# Altium PCB stm32G431_foc.pcbdoc (part 2 of 2)
Units mil, origin at the board's own origin, x right, y up, seen from the top; angles counter-clockwise.
Board outline 3189.03 x 2357.25 mil, 2 copper layers (Top Layer, Bottom Layer); 90 components, 81 nets, 390 pads, 421 vias.
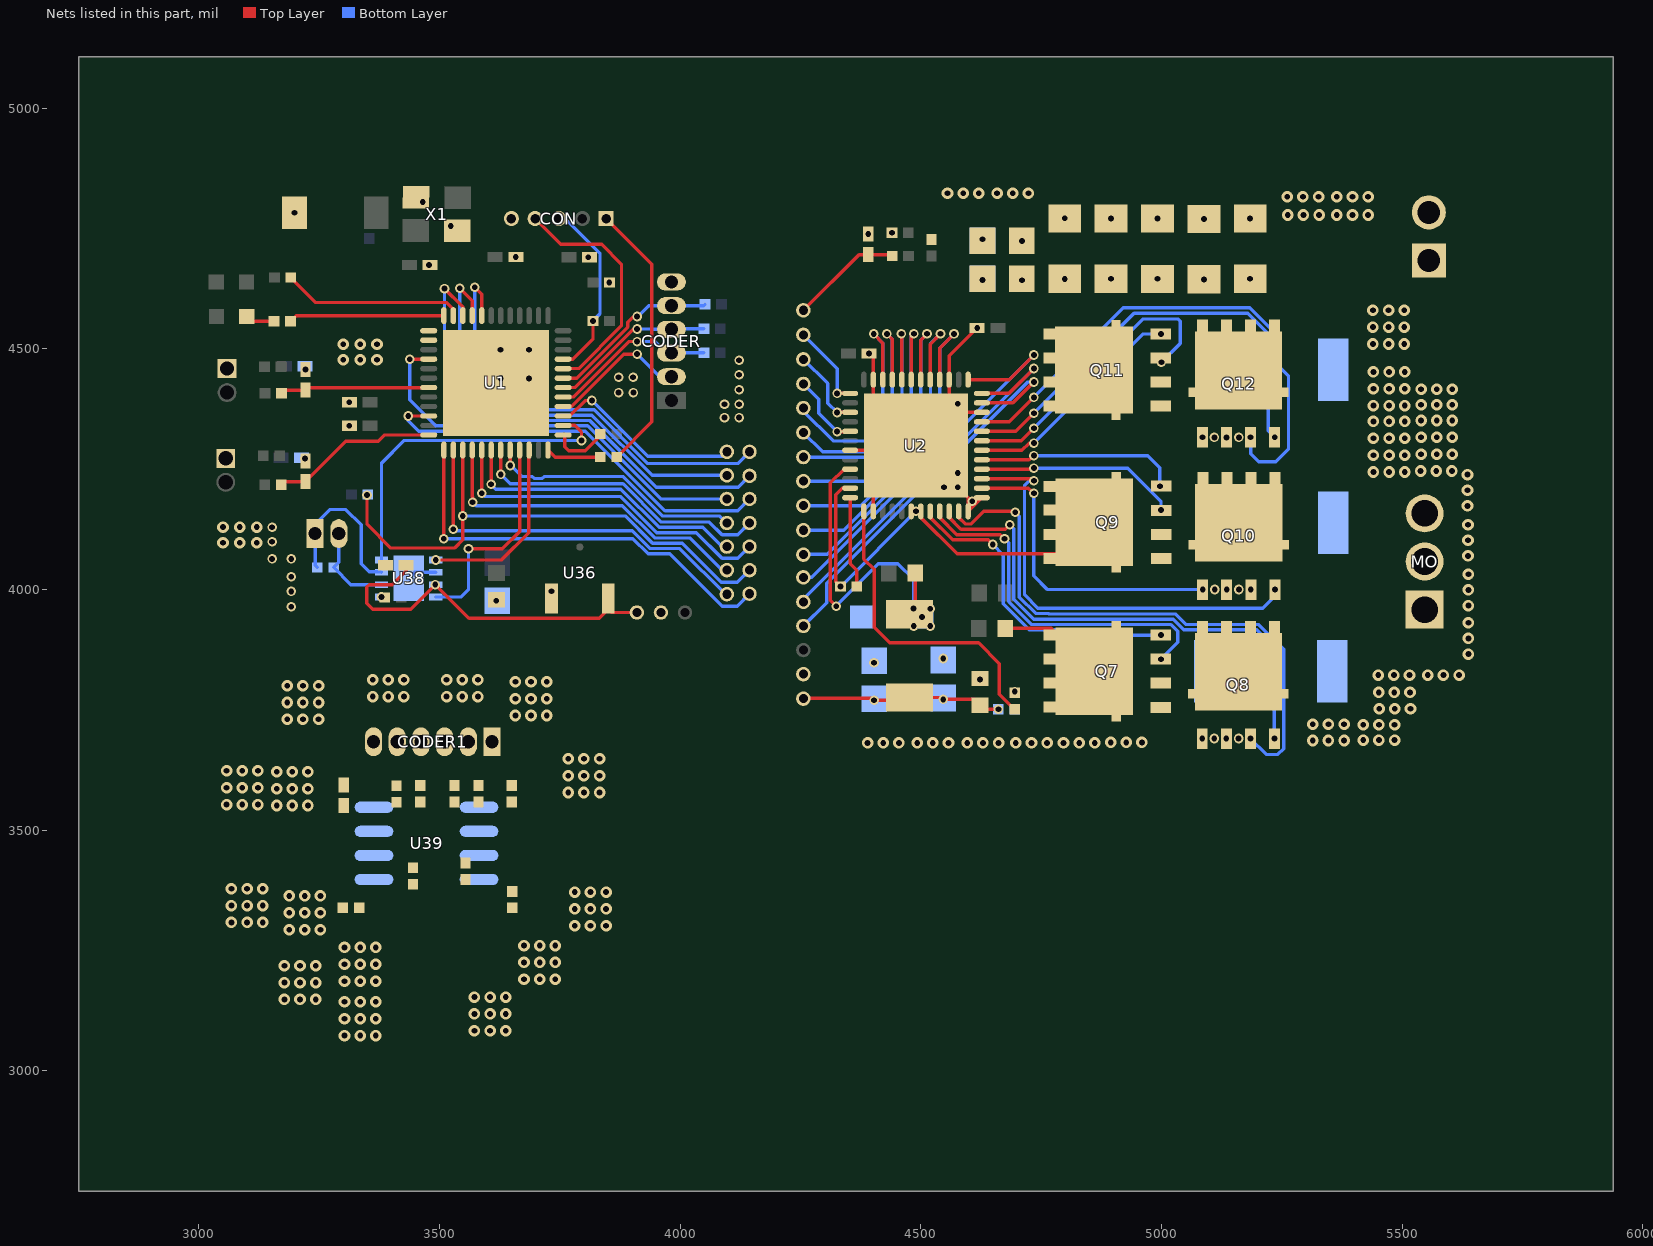
[diagram p2: the nets of this part, all layers, seen from the top]

## Via types
v1: diameter 24.02, hole 12.01, Top Layer to Bottom Layer, 261 vias
v2: diameter 20, hole 12.01, Top Layer to Bottom Layer, 160 vias

## Nets (pads, with @x,y where several pads share a name; then routed paths per layer and width w, separated by ;. In a path a pad name is that pad's centre, name@x,y a point inside that pad or via, vN(x,y) a via of type N, cw(c..) or ccw(c..) an arc to the next point about the centre after c; other vN are vias at no path point) (continued)
$1N22747: CON.1 R48.2 | length 565.1
  Top Layer w7: CON.1@3846.11,4770.82 3940.97,4675.96 3940.97,4348.14 R48.2@3868.01,4275.18
$1N22797: R42.1 U2.48 | length 190.5
  Top Layer w7: U2.48@4353.17,4190.91 4353.17,4053.98 4367.01,4040.14 R42.1@4367.01,4006.18
$1N32865: CAN.2 R43.1 U38.6 | length 189.1
  Bottom Layer w7: CAN.2@3290.58,4116.18 3290.58,4056.48 R43.1@3279.87,4045.77 3315.5,4010.14 U38.6@3379.34,4010.14
$1N35691: U1.13
$1N35795: U1.14
$1N35883: R46.1 U38.5
  other v2: 3379.34,3984.55
$1N46251: LED1.1 R49.2 | length 60.9
  Top Layer w7: LED1.1@3099.29,4567.47 3109.57,4557.18 R49.2@3155.93,4557.18
$1N47947: CAN.1 R43.2 U38.7 | length 343.5
  Bottom Layer w7: R43.2@3245.79,4045.77 3241.37,4050.19 CAN.1@3241.37,4116.18 3241.37,4135.58 3271.97,4166.18 3304.97,4166.18 3336.97,4134.18 3336.97,4053.7 3353.42,4037.25 3377.82,4037.25 U38.7@3379.34,4035.73
$1N50184: CODER1.5 R5.1
$1N50185: CODER1.4 R6.1 R8.1
$1N50186: CODER1.3 R7.1 R9.1
$1N50187: CODER1.2 R50.1 R51.1
$1N50188: R7.2 R51.2 R52.1
+5V: C48.2 C49.2 C50.2 C77.2 L2.2 pad.1@3909.97,3952.18 pad.1@4255.97,3773.18 R12.2 U36.3 U38.3 | length 1210.2
  Top Layer w7: C77.2@3430.65,4050.26 3430.65,4038.87 3401.97,4010.18 3353.97,4010.18 3349.02,4005.24 3349.02,3971.13 3360.97,3959.18 3439.97,3959.18 v2(3490.97,4010.18) 3561.08,3940.07 3831.86,3940.07 3850.61,3958.82 U36.3@3850.61,3959.55 ; U36.3@3850.61,3981.56 U36.3@3850.61,3959.55 ; pad.1@3909.97,3952.18 3857.97,3952.18 U36.3@3850.61,3959.55 ; pad.1@4255.97,3773.18 4256.59,3773.8 4398.99,3773.8 v2(4402.9,3769.9) 4470.87,3769.9 L2.2@4476.48,3775.51 4543,3775.51 v2(4546.81,3771.7) 4610.9,3771.7 C50.2@4622.97,3759.62 4631.41,3751.18 v2(4661.23,3751.18)
CAN_RX: U1.33 U38.4 | length 449.9
  Top Layer w7: v2(3559.97,4084.82) 3630.6,4084.82 3666.34,4120.55 U1.33@3666.34,4289.76
  Bottom Layer w7: U38.4@3492.14,3984.55 3545.34,3984.55 3559.97,3999.18 v2(3559.97,4084.82)
CAN_STB: U1.38 U38.8 | length 697.8
  Top Layer w7: U1.38@3756.8,4340.82 3757.16,4341.18 3780.97,4341.18 3794.83,4327.33 v2(3794.83,4309.67)
  Bottom Layer w7: U38.8@3379.34,4061.33 3379.34,4262.55 3426.46,4309.67 v2(3794.83,4309.67)
CAN_TX: U1.34 U38.1 | length 388.4
  Top Layer w7: v2(3492.14,4061.33) 3628.12,4061.33 3684.97,4118.18 3684.97,4288.69 U1.34@3686.04,4289.76
CSQ: R5.2 U39.3
DATA: R52.2 R53.1 U39.4
DBUG_RX: CON.3 R40.2 U1.45 | length 379.1
  Top Layer w7: U1.45@3756.8,4478.62 3776.98,4478.62 3818.93,4520.57 v2(3818.93,4558.18)
  Bottom Layer w7: CON.3@3747.69,4770.82 3761.22,4770.82 3833.23,4698.81 3833.23,4572.49 v2(3818.93,4558.18)
DBUG_TX: CON.4 U1.44 | length 505
  Top Layer w7: CON.4@3698.48,4770.82 3752.11,4717.18 3836.97,4717.18 3877.97,4676.18 3877.97,4547.97 3789.19,4459.18 3757.06,4459.18 U1.44@3756.8,4458.92
DRV_CAL: pad.1@4143.97,4188.18 pad.1@4255.97,4377.18 U1.22 U2.34 | length 1365.4
  Top Layer w7: v2(3434.97,4360.52) U1.22@3477.48,4360.52 ; v2(4401.97,4531.18) 4421.07,4512.08 U2.34@4421.07,4435.98
  Bottom Layer w7: v2(3434.97,4360.52) 3434.97,4350.52 3456.34,4329.15 3802.9,4329.15 3968.35,4163.7 4119.49,4163.7 pad.1@4143.97,4188.18 ; pad.1@4255.97,4377.18 4255.97,4370.63 4317.9,4308.7 4396.49,4308.7 4420.97,4333.18 4420.97,4512.18 v2(4401.97,4531.18)
DRV_CS: pad.1@4143.97,3991.18 pad.1@4255.97,4275.18 U1.25 U2.32 | length 1436.5
  Top Layer w7: v2(3508.84,4105.68) U1.25@3508.84,4289.76 ; v2(4459.65,4531.58) 4460.44,4530.79 U2.32@4460.44,4435.98
  Bottom Layer w7: v2(3508.84,4105.68) 3901.74,4105.68 3933.34,4074.09 3978.44,4074.09 4087.11,3965.42 4118.21,3965.42 pad.1@4143.97,3991.18 ; pad.1@4255.97,4275.18 4445.08,4275.18 4460.97,4291.08 4460.97,4530.26 v2(4459.65,4531.58)
DRV_EN: pad.1@4096.97,4286.18 pad.1@4255.97,4326.18 U1.39 U2.33 | length 941.8
  Top Layer w7: U1.39@3756.8,4360.52 3757.61,4359.7 3769.69,4359.7 3802.69,4392.7 v2(3816.55,4392.7) ; v2(4429.56,4531.18) 4440.76,4519.98 U2.33@4440.76,4435.98
  Bottom Layer w7: v2(3816.55,4392.7) 3817.25,4392.7 3932.89,4277.06 4087.85,4277.06 pad.1@4096.97,4286.18 ; pad.1@4255.97,4326.18 4295.96,4286.2 4414.99,4286.2 4440.97,4312.18 4440.97,4519.77 v2(4429.56,4531.18)
DRV_FAULT: pad.1@4143.97,4089.18 pad.1@4255.94,4072.38 U1.29 U2.28 | length 1436.7
  Top Layer w7: v2(3587.64,4200.14) U1.29@3587.64,4289.76 ; U2.28@4539.18,4435.98 4539.18,4501.39 v2(4568.97,4531.18)
  Bottom Layer w7: v2(3587.64,4200.14) 3594.64,4193.14 3876.6,4193.14 3951.59,4118.15 4033.38,4118.15 4086.83,4064.7 4119.49,4064.7 pad.1@4143.97,4089.18 ; pad.1@4255.94,4072.38 4256.75,4073.18 4305.39,4073.18 4538.97,4306.76 4538.97,4501.18 v2(4568.97,4531.18)
DRV_MISO: pad.1@4143.97,4040.18 pad.1@4255.97,4123.18 R15.1 U1.27 U2.29 | length 1816.4
  Top Layer w7: v2(3349.24,4196.18) 3349.24,4135.5 3398.53,4086.2 3530.99,4086.2 3548.24,4103.45 v2(3548.24,4152.84) U1.27@3548.24,4289.76 ; U2.29@4519.5,4435.98 4519.5,4510.06 v2(4540.9,4531.46)
  Bottom Layer w7: v2(3548.24,4152.84) 3885.75,4152.84 3942.46,4096.12 4004.02,4096.12 4084.96,4015.18 4118.97,4015.18 pad.1@4143.97,4040.18 ; pad.1@4255.97,4123.18 4339.81,4123.18 4519.97,4303.34 4519.97,4510.53 v2(4540.9,4531.46)
DRV_MOSI: pad.1@4096.97,4040.18 pad.1@4255.97,4174.18 U1.28 U2.30 | length 1329.5
  Top Layer w7: U1.28@3567.94,4289.76 3567.94,4192.28 3568.68,4191.54 v2(3568.68,4181.35) ; U2.30@4499.81,4435.98 4499.81,4518.13 v2(4512.92,4531.24)
  Bottom Layer w7: v2(3568.68,4181.35) 3575.68,4174.35 3879.81,4174.35 3947.02,4107.14 4020.12,4107.14 4087.07,4040.18 pad.1@4096.97,4040.18 ; pad.1@4255.97,4174.18 4375.24,4174.18 4499.97,4298.92 4499.97,4518.29 v2(4512.92,4531.24)
DRV_SCLK: pad.1@4096.97,3990.18 pad.1@4255.97,4225.18 U1.26 U2.31 | length 1378.7
  Top Layer w7: v2(3528.54,4125.17) U1.26@3528.54,4289.76 ; U2.31@4480.13,4435.98 4480.13,4525.96 v2(4485.63,4531.46)
  Bottom Layer w7: v2(3528.54,4125.17) 3531.54,4122.17 3900.84,4122.17 3937.9,4085.11 3999.46,4085.11 4094.38,3990.18 pad.1@4096.97,3990.18 ; pad.1@4255.97,4225.18 4410.66,4225.18 4479.97,4294.5 4479.97,4525.8 v2(4485.63,4531.46)
FB: R12.1 R13.2 U2.1 | length 650
  Top Layer w7: U2.1@4381.7,4162.38 4381.7,4063.32 4402.97,4042.05 4402.97,3921.18 4434.97,3889.18 4619.97,3889.18 4662.97,3846.18 4662.97,3782.05 4693.87,3751.14 R13.2@4694.97,3751.14
GHA: Q7.4 U2.8 | length 652.7
  Top Layer w7: U2.8@4519.5,4162.38 4519.5,4149.64 4566.02,4103.12 4639.77,4103.12 v2(4649.27,4093.62)
  Bottom Layer w7: v2(4649.27,4093.62) 4671.42,4071.47 4671.42,3970.42 4725.67,3916.17 4826.72,3916.17 4837.66,3905.23 v2(4999,3905.23)
GHB: Q9.4 U2.17 | length 422.6
  Top Layer w7: U2.17@4626.77,4269.65 4724.86,4269.65 4733.4,4278.2 v2(4734.97,4278.2)
  Bottom Layer w7: v2(4734.97,4278.2) 4971.96,4278.2 4996.7,4253.45 v2(4996.7,4214.6)
GHC: Q11.4 U2.18 | length 472.3
  Top Layer w7: U2.18@4626.77,4289.34 4626.93,4289.18 4710.07,4289.18 4725.07,4304.18 v2(4734.97,4304.18)
  Bottom Layer w7: v2(4734.97,4304.18) 4961.78,4530.99 v2(4998.87,4530.99)
GLA: Q8.4 U2.10 | length 1083.5
  Top Layer w7: U2.10@4558.87,4162.38 4558.87,4149.64 4583.36,4125.15 4675.48,4125.15 v2(4684.99,4134.66)
  Bottom Layer w7: v2(4684.99,4134.66) 4693.46,4126.19 4693.46,3979.54 4734.8,3938.2 5024.53,3938.2 5046.55,3916.18 5197.97,3916.18 5234.77,3879.38 v2(5234.77,3690.27)
GLB: Q10.4 U2.15 | length 917.1
  Top Layer w7: U2.15@4626.77,4230.28 4730.87,4230.28 v2(4734.97,4226.18)
  Bottom Layer w7: v2(4734.97,4226.18) 4725.07,4226.18 4715.49,4216.6 4715.49,3988.67 4742.97,3961.18 5210.97,3961.18 5235.68,3985.89 v2(5235.68,3999.92)
GLC: Q12.4 U2.20 | length 935.2
  Top Layer w7: U2.20@4626.77,4328.71 4697.5,4328.71 v2(4734.97,4366.18)
  Bottom Layer w7: v2(4734.97,4366.18) 4942.97,4574.18 5178.97,4574.18 5221.97,4531.18 5221.97,4329.46 v2(5235.28,4316.15)
GND: C1.1 C2.1 C44.1 C47.1 C48.1 C49.1 C50.1 C52.1 C53.1 C57.1 C59.2 C60.1 C61.1 C62.1 C63.1 C64.1 C65.1 C66.1 C67.1 C68.1 C69.1 C70.1 C71.1 C72.1 C73.1 C77.1 C78.1 CODER1.1 CODER.6 CON.5 D1.2 pad.1@3959.97,3952.18 pad.1@4255.97,3824.18 R11.2 R13.1 R18.2 R19.2 R20.2 R34.1 RST.1 TMP1.1 TMP2.1 U1.49 U2.2 U2.12 U2.13 U2.22 U2.27 U2.35 U2.43 U2.49 U36.1 U38.2 U38.9 U39.7 VIN.2 X1.2 X1.4 | length 1069.2
  Top Layer w7: U2.43@4353.17,4289.34 4480.13,4289.34 4401.39,4210.6 U2.2@4401.39,4162.38 ; v2(4392.43,4490.18) 4401.39,4481.22 U2.35@4401.39,4435.98 4401.39,4387.76 U2.49@4489.97,4299.18 v2(4576.59,4212.57) 4598.24,4190.91 U2.12@4598.24,4162.38 U2.13@4626.77,4190.91 ; v2(4617.05,4543.64) 4558.87,4485.46 U2.27@4558.87,4435.98 4558.87,4368.08 U2.22@4626.77,4368.08
  Bottom Layer w7: U38.9@3435.74,4022.94 3448.53,4035.73 U38.2@3492.14,4035.73
  other v1: 3302.47,3073.18 3334.97,3073.18 3367.47,3073.18 3572.47,3083.18 3604.97,3083.18 3637.47,3083.18 3302.47,3108.18 3334.97,3108.18 3367.47,3108.18 3572.47,3118.18 3604.97,3118.18 3637.47,3118.18 3302.47,3143.18 3334.97,3143.18 3367.47,3143.18 3177.47,3148.18 3209.97,3148.18 3242.47,3148.18 3572.47,3153.18 3604.97,3153.18 3637.47,3153.18 3177.47,3183.18 3209.97,3183.18 3242.47,3183.18 3302.47,3186.18 3334.97,3186.18 3367.47,3186.18 3675.47,3190.18 3707.97,3190.18 3740.47,3190.18 3177.47,3218.18 3209.97,3218.18 3242.47,3218.18 3302.47,3221.18 3334.97,3221.18 3367.47,3221.18 3675.47,3225.18 3707.97,3225.18 3740.47,3225.18 3302.47,3256.18 3334.97,3256.18 3367.47,3256.18 3675.47,3260.18 3707.97,3260.18 3740.47,3260.18 3187.47,3293.18 3219.97,3293.18 3252.47,3293.18 3780.97,3301.18 3813.47,3301.18 3845.97,3301.18 3067.47,3308.18 3099.97,3308.18 3132.47,3308.18 3187.47,3328.18 3219.97,3328.18 3252.47,3328.18 3780.97,3336.18 3813.47,3336.18 3845.97,3336.18 3067.47,3343.18 3099.97,3343.18 3132.47,3343.18 3187.47,3363.18 3219.97,3363.18 3252.47,3363.18 3780.97,3371.18 3813.47,3371.18 3845.97,3371.18 3067.47,3378.18 3099.97,3378.18 3132.47,3378.18 3161.47,3551.18 3193.97,3551.18 3226.47,3551.18 3057.47,3553.18 3089.97,3553.18 3122.47,3553.18 3767.47,3578.18 3799.97,3578.18 3832.47,3578.18 3161.47,3586.18 3193.97,3586.18 3226.47,3586.18 3057.47,3588.18 3089.97,3588.18 3122.47,3588.18 3767.47,3613.18 3799.97,3613.18 3832.47,3613.18 3161.47,3621.18 3193.97,3621.18 3226.47,3621.18 3057.47,3623.18 3089.97,3623.18 3122.47,3623.18 3767.47,3648.18 3799.97,3648.18 3832.47,3648.18 4389.47,3681.18 4421.97,3681.18 4454.47,3681.18 4492.47,3681.18 4524.97,3681.18 4557.47,3681.18 4596.47,3681.18 4628.97,3681.18 4661.47,3681.18 4697.47,3681.18 4729.97,3681.18 4762.47,3681.18 4796.47,3681.18 4828.97,3681.18 4861.47,3681.18 4894.47,3682.18 4926.97,3682.18 4959.47,3682.18 5314.47,3686.18 5346.97,3686.18 5379.47,3686.18 5419.47,3687.18 5451.97,3687.18 5484.47,3687.18 5419.47,3719.18 5451.97,3719.18 5484.47,3719.18 5314.47,3720.18 5346.97,3720.18 5379.47,3720.18 3183.47,3730.18 3215.97,3730.18 3248.47,3730.18 3657.47,3738.18 3689.97,3738.18 3722.47,3738.18 5452.47,3752.18 5484.97,3752.18 5517.47,3752.18 3183.47,3765.18 3215.97,3765.18 3248.47,3765.18 3657.47,3773.18 3689.97,3773.18 3722.47,3773.18 3361.01,3777.46 3393.51,3777.46 3426.01,3777.46 3514.64,3777.46 3547.14,3777.46 3579.64,3777.46 5451.47,3786.18 5483.97,3786.18 5516.47,3786.18 3183.47,3800.18 3215.97,3800.18 3248.47,3800.18 3657.47,3808.18 3689.97,3808.18 3722.47,3808.18 3361.01,3812.46 3393.51,3812.46 3426.01,3812.46 3514.64,3812.46 3547.14,3812.46 3579.64,3812.46 5450.47,3822.18 5482.97,3822.18 5515.47,3822.18 5553.47,3822.18 5585.97,3822.18 5618.47,3822.18 5637.91,3865.84 5637.91,3898.34 5637.91,3930.84 5637.97,3966.68 5637.97,3999.18 5637.97,4031.68 5636.97,4069.68 3049.97,4097.18 3084.97,4097.18 3119.97,4097.18 5636.97,4102.18 3049.97,4129.68 3084.97,4129.68 3119.97,4129.68 5636.97,4134.68 5635.97,4173.68 5635.97,4206.18 5635.97,4238.68 5440.47,4244.18 5472.97,4244.18 5505.47,4244.18 5538.47,4246.18 5570.97,4246.18 5603.47,4246.18 5440.47,4279.18 5472.97,4279.18 5505.47,4279.18 5539.47,4281.18 5571.97,4281.18 5604.47,4281.18 5440.47,4314.18 5472.97,4314.18 5505.47,4314.18 5539.47,4316.18 5571.97,4316.18 5604.47,4316.18 5440.47,4349.18 5472.97,4349.18 5505.47,4349.18 5539.47,4351.18 5571.97,4351.18 5604.47,4351.18 5440.47,4382.18 5472.97,4382.18 5505.47,4382.18 5539.47,4384.02 5571.97,4384.02 5604.47,4384.02 5539.47,4416.18 5571.97,4416.18 5604.47,4416.18 5440.47,4417.18 5472.97,4417.18 5505.47,4417.18 5440.47,4452.18 5472.97,4452.18 5505.47,4452.18 3299.97,4477.18 3334.97,4477.18 3369.97,4477.18 3299.97,4509.68 3334.97,4509.68 3369.97,4509.68 5439.47,4510.18 5471.97,4510.18 5504.47,4510.18 5439.47,4545.18 5471.97,4545.18 5504.47,4545.18 5439.47,4580.18 5471.97,4580.18 5504.47,4580.18 5262.47,4778.18 5294.97,4778.18 5327.47,4778.18 5364.47,4778.18 5396.97,4778.18 5429.47,4778.18 5261.47,4816.18 5293.97,4816.18 5326.47,4816.18 5364.47,4816.18 5396.97,4816.18 5429.47,4816.18 4555.47,4823.18 4587.97,4823.18 4620.47,4823.18 4658.47,4823.18 4690.97,4823.18 4723.47,4823.18
  other v2: 4694.97,3787.83 4622.97,3812.78 4402.71,3847.75 4546.81,3856.54 3191.99,3964.28 3617.97,3976.81 3191.99,3996.1 3732.5,3996.56 3191.99,4026.34 3151.97,4063.64 3191.99,4063.64 3151.97,4099.22 3151.97,4129.18 4606.97,4183.18 4548.28,4212.57 4576.59,4242.2 3220.15,4272.1 3312.51,4340.18 4091.97,4357.18 4122.41,4357.18 4091.96,4385.13 4122.41,4385.13 4576.59,4385.8 3312.51,4389.18 3871.97,4409.18 3902.75,4409.18 4122.41,4414.89 3626.98,4438.28 3686,4438.28 3871.97,4441.18 3902.07,4441.18 4122.41,4446.03 3221.51,4457.07 4122.41,4476.48 3626.88,4498.18 3685.97,4498.18 3852.72,4638.18 3477.87,4674.18 3808.87,4690.18 3658.43,4691.18 4710.1,4724.42 4628.1,4727.73 4390.97,4738.64 4440.03,4741.12 3523.05,4755.46 5088.26,4770.11 4799.26,4771.4 4895.26,4770.94 4991.75,4770.94 5184.26,4771.11 3198.44,4782.81 3464.97,4805.18
IFA: R9.2 U39.5
IFB: R50.2 U39.8
IFC: R8.2 U39.1
INHA: pad.1@4096.97,4089.18 pad.1@4255.97,4529.18 U1.30 U2.37 | length 792.6
  Top Layer w7: v2(3607.12,4218.62) 3607.12,4289.55 U1.30@3607.34,4289.76 ; v2(4325.97,4407.45) U2.37@4353.17,4407.45
  Bottom Layer w7: v2(3607.12,4218.62) 3617.08,4208.67 3876.65,4208.67 3956.15,4129.17 4047.09,4129.17 4087.07,4089.18 pad.1@4096.97,4089.18 ; pad.1@4255.97,4529.18 4325.97,4459.18 v2(4325.97,4407.45)
INHB: pad.1@4143.97,4138.18 pad.1@4255.97,4478.18 U1.31 U2.39 | length 797.3
  Top Layer w7: v2(3626.94,4239.11) U1.31@3626.94,4289.76 ; v2(4325.97,4367.88) 4326.18,4368.08 U2.39@4353.17,4368.08
  Bottom Layer w7: v2(3626.94,4239.11) 3646.36,4219.68 3881.21,4219.68 3960.71,4140.18 4060.35,4140.18 4086.83,4113.7 4119.49,4113.7 pad.1@4143.97,4138.18 ; pad.1@4255.97,4478.18 4255.97,4478.64 4306.49,4428.12 4306.49,4387.36 v2(4325.97,4367.88)
INHC: pad.1@4096.97,4138.18 pad.1@4255.97,4427.18 U1.32 U2.41 | length 690.6
  Top Layer w7: U1.32@3646.64,4289.76 3646.85,4289.54 v2(3646.85,4257.59) ; v2(4325.97,4328.18) 4352.64,4328.18 U2.41@4353.17,4328.71
  Bottom Layer w7: v2(3646.85,4257.59) 3648.85,4257.59 3671.74,4234.7 3692.9,4234.7 3696.9,4230.7 3713.04,4230.7 3717.04,4234.7 3881.78,4234.7 3963.79,4152.68 4082.47,4152.68 pad.1@4096.97,4138.18 ; pad.1@4255.97,4427.18 4287.97,4395.18 4287.97,4366.18 v2(4325.97,4328.18)
LED_1: R31.1 U1.11 | length 378.3
  Top Layer w7: R31.1@3191.01,4648.18 3242.92,4596.28 3515.05,4596.28 3528.54,4582.79 U1.11@3528.54,4569.08
LED_2: R49.1 U1.12 | length 323.8
  Top Layer w7: R49.1@3190.01,4557.18 3201.9,4569.08 U1.12@3508.84,4569.08
SCK: R6.2 U39.2
SHA: MO.1 Q7.1 Q7.2 Q7.3 Q8.5 Q8.6 Q8.7 Q8.8 Q8.9 U2.9 | length 749.6
  Top Layer w7: U2.9@4539.18,4162.38 4539.18,4149.65 4574.69,4114.14 4665.5,4114.14 v2(4673.97,4105.67)
  Bottom Layer w7: v2(4673.97,4105.67) 4682.44,4097.2 4682.44,3974.98 4730.24,3927.18 5019.97,3927.18 5033.97,3913.18 5033.97,3890.18 v2(4998.97,3855.18)
SHB: MO.2 Q9.1 Q9.2 Q9.3 Q10.5 Q10.6 Q10.7 Q10.8 Q10.9 U2.16 | length 419.7
  Top Layer w7: U2.16@4626.77,4249.97 4732.73,4249.97 v2(4734.97,4252.22)
  Bottom Layer w7: v2(4734.97,4252.22) 4929.94,4252.22 4998.97,4183.18 v2(4998.97,4165.18)
SHC: MO.3 Q11.1 Q11.2 Q11.3 Q12.5 Q12.6 Q12.7 Q12.8 Q12.9 U2.19 | length 620.2
  Top Layer w7: U2.19@4626.77,4309.02 4708.81,4309.02 v2(4734.97,4335.18)
  Bottom Layer w7: v2(4734.97,4335.18) 4961.97,4562.18 5033.97,4562.18 5038.92,4557.24 5038.92,4511.18 v2(4999.95,4472.21)
SOA: pad.1@4143.97,4236.18 pad.1@4255.97,4025.18 U1.10 U2.25 | length 1856.4
  Top Layer w7: v2(3510.24,4625.18) 3548.24,4587.18 U1.10@3548.24,4569.08 ; U2.25@4598.24,4435.98 4683.77,4435.98 v2(4734.97,4487.18)
  Bottom Layer w7: v2(3510.24,4625.18) 3510.24,4382.92 3541.97,4351.18 3812.03,4351.18 3950.51,4212.7 4120.49,4212.7 pad.1@4143.97,4236.18 ; pad.1@4255.97,4025.18 4272.97,4025.18 v2(4734.97,4487.18)
SOB: pad.1@4096.97,4237.18 pad.1@4255.97,3974.18 U1.9 U2.24 | length 1733.5
  Top Layer w7: v2(3541.97,4626.18) 3567.94,4600.22 U1.9@3567.94,4569.08 ; U2.24@4626.77,4407.45 4683.24,4407.45 v2(4734.97,4459.18)
  Bottom Layer w7: v2(3541.97,4626.18) 3541.97,4393.18 3572.96,4362.2 3816.59,4362.2 3941.61,4237.18 pad.1@4096.97,4237.18 ; pad.1@4255.97,3974.18 4255.97,3980.18 v2(4734.97,4459.18)
SOC: pad.1@4143.97,4286.18 pad.1@4255.97,3924.18 U1.8 U2.23 | length 1775.8
  Top Layer w7: v2(3572.97,4628.18) 3587.64,4613.52 U1.8@3587.64,4569.08 ; U2.23@4626.77,4387.76 4691.54,4387.76 v2(4734.96,4431.18)
  Bottom Layer w7: v2(3572.97,4628.18) 3572.97,4391.18 3590.94,4373.22 3821.15,4373.22 3932.67,4261.7 4119.49,4261.7 pad.1@4143.97,4286.18 ; pad.1@4255.97,3924.18 4304.63,3972.84 4304.63,4013.26 4722.55,4431.18 v2(4734.96,4431.18)
SPA: Q8.1 Q8.2 Q8.3 R18.1 U2.11 | length 1216.3
  Top Layer w7: U2.11@4578.55,4162.38 4578.55,4149.65 4592.03,4136.17 4604.45,4136.17 4630.67,4162.38 4694.05,4162.38 v2(4696,4160.44)
  Bottom Layer w7: v2(4696,4160.44) 4704.47,4151.97 4704.47,3984.11 4738.41,3950.17 4764.49,3950.17 4765.44,3949.22 5029.1,3949.22 5051.11,3927.2 5202.53,3927.2 5254.26,3875.48 5254.26,3669.47 5241.97,3657.18 5217.86,3657.18 v2(5184.77,3690.27)
  other v2: 5084.77,3690.27 5109.71,3690.27 5134.77,3690.27 5160.34,3690.27
SPB: Q10.1 Q10.2 Q10.3 R19.1 U2.14 | length 647.1
  Top Layer w7: U2.14@4626.77,4210.6 4723,4210.6 4726.9,4206.7 4728.47,4206.7 v2(4734.97,4200.2)
  Bottom Layer w7: v2(4734.97,4200.2) 4734.97,4028.18 4763.24,3999.92 v2(5085.88,3999.92)
  other v2: 5110.6,3999.92 5135.68,3999.92 5160.94,3999.92 5185.68,3999.92
SPC: Q12.1 Q12.2 Q12.3 R20.1 U2.21 | length 1112.8
  Top Layer w7: U2.21@4626.77,4348.39 4684.18,4348.39 v2(4734.97,4399.18)
  Bottom Layer w7: v2(4734.97,4399.18) 4920.97,4585.18 5183.53,4585.2 5232.99,4535.75 5232.99,4475.17 5263.97,4444.18 5263.97,4291.18 5237.97,4265.18 5201.97,4265.18 5185.28,4281.87 v2(5185.28,4316.15)
  other v2: 5085.28,4316.15 5110.01,4316.04 5135.28,4316.04 5160.94,4316.04
SPI1_CS: CODER.2 U1.40 | length 289.6
  Top Layer w7: U1.40@3756.8,4380.22 3773.58,4380.22 3882.58,4489.22 v2(3910.47,4489.22)
  Bottom Layer w7: v2(3910.47,4489.22) 3957.52,4442.17 CODER.2@3981.78,4442.17
SPI1_MISO_A: CODER.4 R24.2 U1.42 | length 343.6
  Top Layer w7: U1.42@3756.8,4419.62 3780.78,4419.62 3902.35,4541.18 v2(3910.47,4541.18)
  Bottom Layer w7: v2(3910.47,4541.18) 3939.84,4541.18 3940.42,4540.6 CODER.4@3981.78,4540.59 3982.99,4541.81 R24.2@4049.27,4541.81
SPI1_MOSI_B: CODER.5 R25.2 U1.43 | length 364.3
  Top Layer w7: U1.43@3756.8,4439.22 3784.8,4439.22 3890.99,4545.4 3890.99,4555.3 3902.85,4567.17 v2(3910.47,4567.17)
  Bottom Layer w7: v2(3910.47,4567.17) 3911.96,4567.17 3934.59,4589.81 CODER.5@3981.78,4589.81 4048.66,4589.81 R25.2@4051.65,4592.79
SPI1_SCLK_Z: CODER.3 R23.2 U1.41 | length 350.3
  Top Layer w7: U1.41@3756.8,4399.92 3777.71,4399.92 3892.99,4515.2 v2(3910.47,4515.2)
  Bottom Layer w7: v2(3910.47,4515.2) 3948.07,4515.2 3971.88,4491.39 CODER.3@3981.78,4491.38 3982.2,4491.81 R23.2@4049.27,4491.81
SW: C76.2 D1.1 L2.1 U2.45 | length 702.3
  Top Layer w7: v2(4324.11,3965.18) 4311.96,3977.34 4311.96,4221.5 4340.43,4249.97 U2.45@4353.17,4249.97 ; L2.1@4476.48,3948.74 4488.53,3960.78 C76.2@4488.53,4034.18
  Bottom Layer w7: v2(4324.11,3965.18) 4324.11,3966.32 4411.46,4053.67 4452.46,4053.67 4484.89,4021.24 v2(4484.89,3960.48) v2(4502.69,3942.68)
  other v2: 4485.4,3923.98 4519.79,3923.98 4519.79,3959.86
SWCLK: R47.1 U1.37 | length 118.5
  Top Layer w7: U1.37@3756.8,4321.12 U1.37@3758.86,4323.18 ; U1.37@3759.86,4320.18 3759.86,4296.29 3767.97,4288.18 3802.93,4288.18 R47.1@3834.93,4320.18
SWDIO: R48.1 U1.36 | length 114.5
  Top Layer w7: U1.36@3725.44,4289.76 3740.01,4275.18 R48.1@3833.93,4275.18
TEMP1_AD: C67.2 R39.1 U1.24 | length 349.6
  Top Layer w7: R39.1@3170.73,4217.76 3177.15,4224.18 C67.2@3221.15,4224.18 3305.15,4308.18 3372.97,4308.18 3385.94,4321.15 U1.24@3477.48,4321.15
TEMP2_AD: C68.2 R37.1 U1.19 | length 311
  Top Layer w7: R37.1@3171.42,4407.76 3177.81,4414.15 C68.2@3221.51,4414.15 3226.94,4419.58 U1.19@3477.48,4419.58
VCC: C78.2 CODER1.6 R53.2 U39.6
VM: C52.2 C53.2 C57.2 C61.2 C62.2 C63.2 C64.2 C65.2 C75.1 Q7.5 Q7.6 Q7.7 Q7.8 Q7.9 Q9.5 Q9.6 Q9.7 Q9.8 Q9.9 Q11.5 Q11.6 Q11.7 Q11.8 Q11.9 R33.2 R42.2 U2.6 U2.7 U2.47 VIN.1 | length 1125.5
  Top Layer w7: v2(4332.93,4006.18) 4322.97,4016.14 4322.97,4197.18 4336.39,4210.6 U2.47@4353.17,4210.6 ; U2.6@4480.13,4162.38 U2.7@4499.81,4162.38 4499.81,4149.65 4575.32,4074.14 4795.22,4074.14 Q9.9@4860.68,4139.6 ; C75.1@4675.53,3919.18 4771.09,3919.18 Q7.9@4860.04,3830.23
  Bottom Layer w7: v2(4332.93,4006.18) 4333.59,4006.18 v2(4489.79,4162.38)
  other v2: 4628.1,4642.9 4710.1,4642.64 5088.26,4644.42 4799.26,4645.42 4895.26,4645.71 4991.75,4645.54 5184.26,4645.71
VM_AD: C66.2 pad.1@4096.97,4188.18 pad.1@4255.97,4580.18 R35.2 U1.16 | length 1101.8
  Top Layer w7: v2(3437.97,4478.63) U1.16@3477.48,4478.63 ; pad.1@4255.97,4580.18 4371.51,4695.72 C66.2@4390.97,4695.72 4437.55,4695.72 R35.2@4440.41,4692.86
  Bottom Layer w7: v2(3437.97,4478.63) 3437.97,4394.18 3491.99,4340.17 3807.46,4340.17 3959.45,4188.18 pad.1@4096.97,4188.18
pads on no net: U1.2 U1.3 U1.4 U1.15 U1.17 U1.18 U1.47 U2.46

## Polygon pours and split planes (outlines as drawn)
GND on Bottom Layer "Bottom Layer-GND" (solid, remove dead copper, pour order 4): 4228.97,4856.18 5688.97,4856.18 5688.97,3642.18 4228.97,3642.18
GND on Bottom Layer "Bottom Layer-GND 1" (solid, remove dead copper, pour order 6): 3002.97,4856.18 4172.97,4856.18 4172.97,3924.18 3002.97,3924.18
GND on Top Layer "Top Layer-GND" (solid, remove dead copper, pour order 0): 3002.97,4856.18 4172.97,4856.18 4172.97,3924.18 3002.97,3924.18
GND on Top Layer "Top Layer-GND 1" (solid, remove dead copper, pour order 2): 4228.97,4856.18 5688.97,4856.18 5688.97,3642.18 4228.97,3642.18

## Keep-outs
Board Outline Layer:
  circle w1: c5576.97,4503.18 r43.31
  circle w1: c5614.97,3717.18 r43.31
  circle w1: c4306.97,4779.18 r43.31
  circle w1: c4301.97,3717.18 r43.31
  circle w1: c3083.97,4011.18 r43.31
  circle w1: c4098.97,4783.18 r43.31
  circle w1: c3074.97,4779.18 r43.31
  lines w10: 3000,3432.44 ccw(c3472.86,3472.64) 3430.17,3000 3431.52,3236.42 ; 3001.07,3431.3 3197.17,3431.3 ccw(c3197.27,3472.64) 3197.27,3513.98 3001.09,3514.01 ; 3001.39,3515.16 cw(c3472.86,3472.64) 3221.25,3873.63 ; 3002.97,4777.18 3002.91,4002.86 ccw(c3081.65,4002.86) 3081.65,3924.12 3223.06,3924.18 ; 3003.91,4777.51 cw(c3082.65,4777.51) 3082.65,4856.25 ; 3084.54,4856.45 4094.29,4857.25 cw(c4094.29,4778.51) 4173.03,4778.51 ; 3223.18,3874.02 3223.18,3924.21 ; 3431.76,3236.42 cw(c3472.86,3236.42) 3513.96,3236.42 ; 3513.96,3236.19 3513.96,3002.06 ccw(c3472.86,3472.64) 3943.61,3433.45 ; 3651.97,3924.28 3651.97,3874.09 3305.97,3874.09 3305.97,3924.28 3652.06,3924.18 ; 3722.97,3874.09 3722.97,3924.28 4094.29,3924.12 ccw(c4094.29,4002.86) 4173.03,4002.86 ; 3725.73,3873.85 cw(c3472.86,3472.64) 3945.2,3515.11 ; 3944.64,3432.24 3748.45,3431.3 cw(c3748.45,3472.64) 3748.45,3513.98 3944.64,3513.98 ; 4172.86,4113.18 4229.08,4113.18 4229.08,4668.18 4172.86,4668.18 4172.86,4114.18 ; 4172.86,4778.18 4229.08,4778.18 ; 4172.97,4003.1 4229.18,4003.1 4228.97,3721.08 ; 4228.91,3719.86 ccw(c4307.65,3719.86) 4307.65,3641.12 5609.28,3641.12 ; 4228.91,4778.12 cw(c4307.65,4778.12) 4307.65,4856.86 ; 4309.54,4857.06 5610.26,4857.06 ; 5610.23,3641.44 ccw(c5610.23,3720.18) 5688.97,3720.18 5688.97,4778.77 ; 5610.29,4857.25 cw(c5610.29,4778.51) 5689.03,4778.51

## Silkscreen, mask and mechanical layers (free items; w line width, h text height)
Top Silkscreen Layer:
  text "GND" at 5353.59,4846.57 h70 r270
  text "r" at 3971.97,4823.18 h30
  text "dio" at 4051.97,4823.18 h30
  text "clk" at 3995.97,4822.18 h30
  text "G" at 3918.97,4821.18 h30
  text "t" at 3944.97,4821.18 h30
  text "rst" at 3147.97,4820.18 h30
  text "mo_b" at 3917.97,4794.18 h30
  text "mi_a" at 3917.97,4768.18 h30
  text "ck_z" at 3918.97,4743.18 h30
  text "cs" at 3941.97,4717.18 h30
  text "L+" at 5354.59,4708.57 h70 r270
  text "3v3" at 3924.42,4692.51 h30
  text "ADbus" at 4235.97,4597.18 h30
  text "PWMa" at 4233.97,4539.18 h30
  text "PWMb" at 4234.97,4487.18 h30
  text "PWMc" at 4234.97,4437.18 h30
  text "DRcal" at 4233.97,4388.18 h30
  text "ADin" at 3009.97,4350.18 h30
  text "DRen" at 4233.97,4336.18 h30
  text "DRen" at 3907.97,4299.18 h30
  text "ADc" at 3994.97,4297.18 h30
  text "DRcs" at 4233.97,4285.18 h30
  text "ADb" at 3905.97,4277.18 h30
  text "ADa" at 3994.97,4275.18 h30
  text "ADbus" at 3905.97,4255.18 h30
  text "DRcal" at 3996.97,4254.18 h30
  text "PWMc" at 3907.97,4234.18 h30
  text "DRclk" at 4232.97,4234.18 h30
  text "PWMb" at 3996.97,4233.18 h30
  text "PWMa" at 3907.97,4212.18 h30
  text "DRerr" at 3996.97,4211.18 h30
  text "DRmo" at 3907.97,4190.18 h30
  text "DRmi" at 3996.97,4190.18 h30
  text "DRmo" at 4233.97,4184.18 h30
  text "DRck" at 3907.97,4169.18 h30
  text "DRcs" at 3996.97,4169.18 h30
  text "C" at 5356.92,4167.24 h30 r270
  text "ADin" at 3009.97,4163.18 h30
  text "DRmi" at 4233.97,4133.18 h30
  text "c_h" at 3161.02,4130.38 h30
  text "c_l" at 3311.97,4128.18 h30
  text "DRerr" at 4233.97,4082.18 h30
  text "B" at 5360.86,4064.38 h30 r270
  text "ADa" at 4234.97,4031.18 h30
  text "ADb" at 4233.97,3982.18 h30
  text "5i" at 3897.97,3966.18 h30
  text "G" at 3950.97,3966.18 h30
  text "A" at 5358.86,3966.38 h30 r270
  text "3V3o" at 3985.97,3965.18 h30
  text "ADc" at 4233.97,3933.18 h30
  text "3V3in" at 4232.97,3882.18 h30
  text "G" at 4233.97,3834.18 h30
  text "5Vo" at 4234.97,3782.18 h30
  text "CK_Z" at 3195.22,3702.43 h30 r270
  text "MI_a" at 3222.22,3702.43 h30 r270
  text "MO_b" at 3245.22,3702.43 h30 r270
  text "G" at 3266.97,3702.18 h30 r270
  text "CS" at 3168.22,3701.43 h30 r270
  text "3V3" at 3141.22,3700.43 h30 r270
Mechanical Layer:
  circle w1: c5576.97,4503.18 r43.31
  circle w1: c5614.97,3717.18 r43.31
  circle w1: c4306.97,4779.18 r43.31
  circle w1: c4301.97,3717.18 r43.31
  circle w1: c3083.97,4011.18 r43.31
  circle w1: c4098.97,4783.18 r43.31
  circle w1: c3074.97,4779.18 r43.31

## Text inside footprints (layer, text, board x,y; h text height)
CODER1: Mechanical 6 "U39" at 3453.01,3434.7 h45 r270